# EAGLE board traintimes (EAGLE 6.5.0)
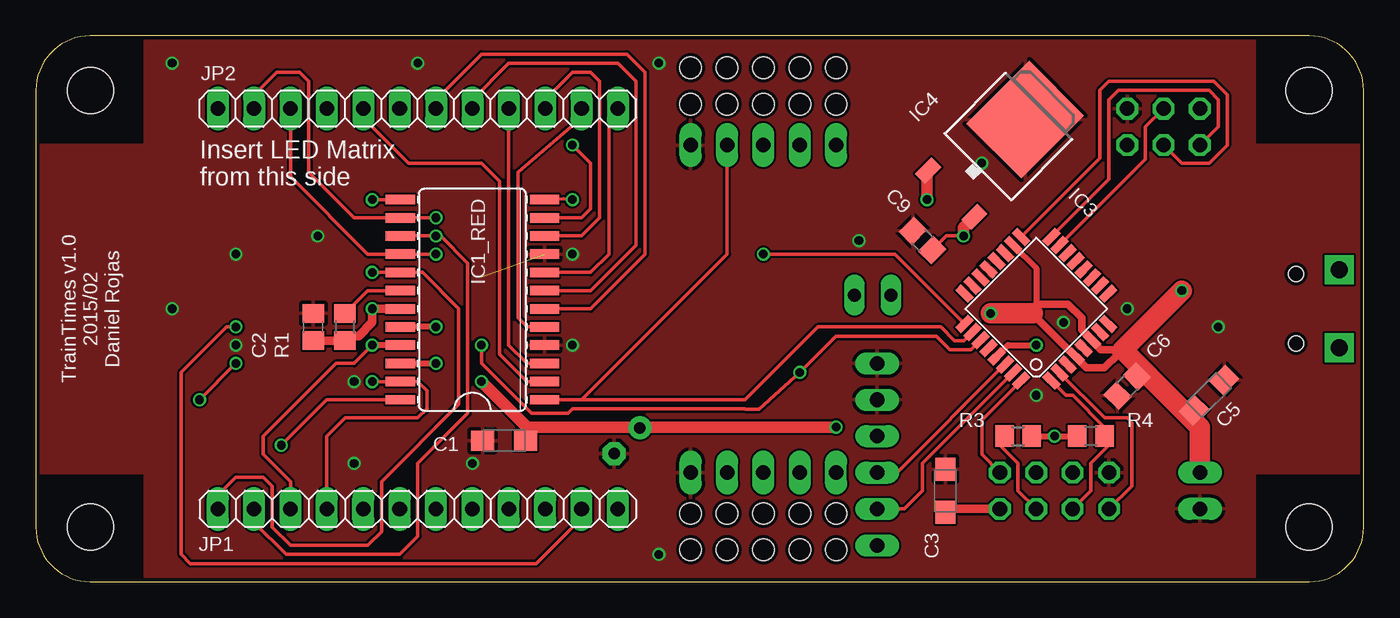
[diagram p0: board, top side]
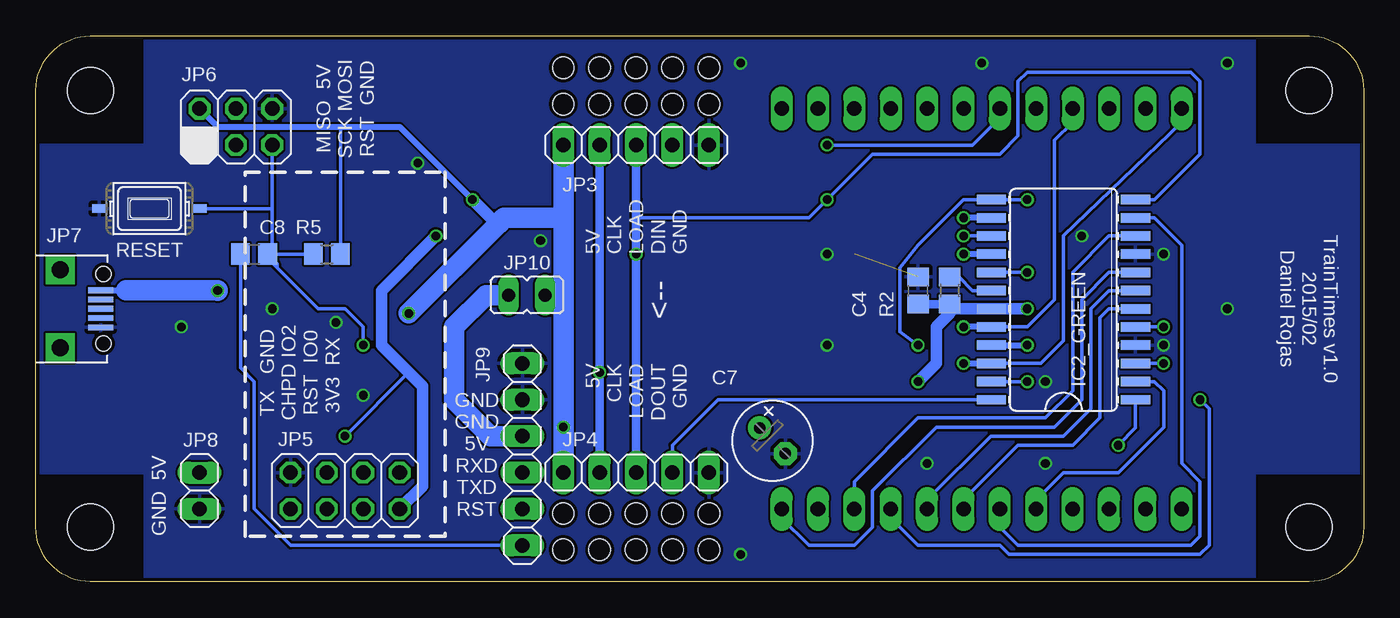
[diagram p1: board, bottom side, seen from below]

Size 92.71 x 38.1 mm. Coordinates in mm from the lower left corner, seen from the top.
Outline: 0,34.29 0,3.81 arc90 3.81,0 88.9,0 arc90 92.71,3.81 92.71,34.29 arc90 88.9,38.1 3.81,38.1 arc90 0,34.29
Copper layers (1*16): Top 0.035mm / dielectric 1.5mm / Bottom 0.035mm
Design rules "ITEADstudio_DRC": minimum track width 6mil, minimum drill 12mil, track to track 6mil, track to pad 6mil, pad to pad 6mil, via to via 6mil, smd to smd 0mil, copper to edge 10mil, drill to drill 10mil, minimum pad ring 10mil, minimum via ring 6mil, stop-mask expansion 2mil, vias tented up to drill 100mil, thermal gap 10mil
Holes 1.5 mm at 45.72,35.88 48.26,35.88 50.8,35.88 53.34,35.88 55.88,35.88 45.72,2.22 48.26,2.22 50.8,2.22 53.34,2.22 55.88,2.22 45.72,33.34 48.26,33.34 50.8,33.34 53.34,33.34 55.88,33.34 45.72,4.76 48.26,4.76 50.8,4.76 53.34,4.76 55.88,4.76
Holes 3.2 mm at 3.81,34.29 3.81,3.81 88.9,3.81 88.9,34.29

## Footprints (pad centres in the part's own frame; a part is rotated, then mirrored left to right if it is on the bottom)
SMC_A = smd 1.6 x 1.4: + -1.5,0; - 1.5,0
C0805 = smd 1.3 x 1.5: 1 -0.95,0; 2 0.95,0
E2,5-6 = drill 0.813 pad 1.6: + -1.27,0 | drill 0.813 pad 1.6 octagon: - 1.27,0
SO24L = smd 0.66 x 2.032: 1 -6.985,-5.029; 2 -5.715,-5.029; 3 -4.445,-5.029; 4 -3.175,-5.029; 5 -1.905,-5.029; 6 -0.635,-5.029; 7 0.635,-5.029; 8 1.905,-5.029; 9 3.175,-5.029; 10 4.445,-5.029; 11 5.715,-5.029; 12 6.985,-5.029; 13 6.985,5.029; 14 5.715,5.029; 15 4.445,5.029; 16 3.175,5.029; 17 1.905,5.029; 18 0.635,5.029; 19 -0.635,5.029; 20 -1.905,5.029; 21 -3.175,5.029; 22 -4.445,5.029; 23 -5.715,5.029; 24 -6.985,5.029
TQFP32-08 = smd 1.27 x 0.559: 1 -4.293,2.8; 2 -4.293,2; 3 -4.293,1.2; 4 -4.293,0.4; 5 -4.293,-0.4; 6 -4.293,-1.2; 7 -4.293,-2; 8 -4.293,-2.8; 17 4.293,-2.8; 18 4.293,-2; 19 4.293,-1.2; 20 4.293,-0.4; 21 4.293,0.4; 22 4.293,1.2; 23 4.293,2; 24 4.293,2.8 | smd 0.559 x 1.27: 9 -2.8,-4.293; 10 -2,-4.293; 11 -1.2,-4.293; 12 -0.4,-4.293; 13 0.4,-4.293; 14 1.2,-4.293; 15 2,-4.293; 16 2.8,-4.293; 25 2.8,4.293; 26 2,4.293; 27 1.2,4.293; 28 0.4,4.293; 29 -0.4,4.293; 30 -1.2,4.293; 31 -2,4.293; 32 -2.8,4.293
TO252 = smd 1 x 1.6: 1 -2.28,-4.8; 2 2.28,-4.8 | smd 5.4 x 6.2: 3 0,2.5
1X12 = drill 1.016 long: 1 -13.97,0; 2 -11.43,0; 3 -8.89,0; 4 -6.35,0; 5 -3.81,0; 6 -1.27,0; 7 1.27,0; 8 3.81,0; 9 6.35,0; 10 8.89,0; 11 11.43,0; 12 13.97,0
1X05 = drill 1.016 long: 1 -5.08,0; 2 -2.54,0; 3 0,0; 4 2.54,0; 5 5.08,0
2X04 = drill 1.016 octagon: 1 -3.81,-1.27; 2 -3.81,1.27; 3 -1.27,-1.27; 4 -1.27,1.27; 5 1.27,-1.27; 6 1.27,1.27; 7 3.81,-1.27; 8 3.81,1.27
2X03 = drill 1.016 octagon: 1 -2.54,-1.27; 2 -2.54,1.27; 3 0,-1.27; 4 0,1.27; 5 2.54,-1.27; 6 2.54,1.27
FCI-10103594-0001LF = smd 0.4 x 1.75: 1 -1.3,4.525; 2 -0.65,4.525; 3 0,4.525; 4 0.65,4.525; 5 1.3,4.525 | drill 1.2 pad 2 square: P$3 -2.725,1.7; P$4 2.725,1.7 | hole 1.05: -2.425,4.73; 2.425,4.73
1X02 = drill 1.016 long: 1 -1.27,0; 2 1.27,0
1X06 = drill 1.016 long: 1 -6.35,0; 2 -3.81,0; 3 -1.27,0; 4 1.27,0; 5 3.81,0; 6 6.35,0
JP1 = drill 0.914 long: 1 0,-1.27; 2 0,1.27
R0805 = smd 1.3 x 1.5: 1 -0.95,0; 2 0.95,0
SW_TACT_3X6 = smd 1 x 0.6: 1 -3.5,0; 2 3.5,0

## Placement (x,y rotation side)
C1  1uF  [SMC_A]  32.7,9.84 180 top
C2  100nF  [C0805]  19.37,17.78 90 top
C3  1uF  [SMC_A]  63.5,6.35 90 top
C4  100nF  [C0805]  31.11,20.32 90 bottom
C5  1uF  [SMC_A]  81.92,13.02 45 top
C6  100nF  [C0805]  76.2,13.65 225 top
C7  22uF  [E2,5-6]  41.27,9.84 315 bottom
C8  100nF  [C0805]  77.47,22.86 0 bottom
C9  100nF  [C0805]  61.91,23.81 135 top
IC1_RED  MAX7221CWG  [SO24L]  30.48,19.68 90 top
IC2_GREEN  MAX7221CWG  [SO24L]  20.95,19.68 90 bottom
IC3  ATMEGA328P  [TQFP32-08]  69.85,19.05 135 top
IC4  TS2940CP33  [TO252]  67.31,30.48 315 top
JP1  LED_PIN_1-12  [1X12]  26.67,5.08 0 top
JP2  LED_PIN_24-13  [1X12]  26.67,33.02 180 top
JP3  BUS_IN  [1X05]  50.8,30.48 0 bottom
JP4  BUS_OUT  [1X05]  50.8,7.62 0 bottom
JP5  ESP-01  [2X04]  71.12,6.35 180 bottom
JP6  ICSP  [2X03]  78.74,31.75 0 bottom
JP7  USB  [FCI-10103594-0001LF]  92.71,19.05 270 bottom
JP8  POWER  [1X02]  81.28,6.35 270 bottom
JP9  FTDI  [1X06]  58.74,8.89 90 bottom
JP10  FTDI_5V_EN  [JP1]  58.42,20 270 bottom
R1  3k3  [R0805]  21.59,17.78 90 top
R2  3k3  [R0805]  28.89,20.32 90 bottom
R3  10k  [R0805]  68.58,10.16 0 top
R4  10k  [R0805]  73.66,10.16 180 top
R5  10k  [R0805]  72.39,22.86 0 bottom
SW1  RESET  [SW_TACT_3X6]  84.77,26.04 180 bottom

## Library data of the parts
C1-C9 R1-R5 = rcl
IC1_RED IC2_GREEN = max7219
IC3 = atmel; MPN: ATMEGA8-16AU; OC_FARNELL: 9171371; OC_NEWARK: 73M8863
IC4 = linear
JP1-JP6 JP8 JP9 = pinhead
JP7 = daspilker
JP10 = jumper
SW1 = dp_devices

## Nets
+3V3: C3.+ C9.1 IC4.2 JP5.2 R3.2 R4.2
+5V: C1.+ C2.1 C4.1 C5.+ C6.1 C7.+ IC1_RED.19 IC2_GREEN.19 IC3.4 IC3.6 IC3.18 IC4.1 JP3.1 JP4.1 JP6.2 JP7.1 JP8.1 JP10.2 R1.1 R2.1 R5.2
CLK: IC1_RED.13 IC2_GREEN.13 IC3.27 JP3.2 JP4.2
DIN_EXT: IC1_RED.1 IC3.26 JP3.4
DINDOUT_INT: IC1_RED.24 IC2_GREEN.1
DOUT_EXT: IC2_GREEN.24 JP4.4
ESP_CHPD: IC3.1 JP5.6 R4.1
ESP_IO0: JP5.3
ESP_IO2: JP5.5
ESP_RST: JP5.4 R3.1
ESP_RX: IC3.32 JP5.1
ESP_TX: IC3.2 JP5.8
GND: C1.- C2.2 C3.- C4.2 C5.- C6.2 C7.- C9.2 IC1_RED.4 IC1_RED.9 IC2_GREEN.4 IC2_GREEN.9 IC3.3 IC3.5 IC3.21 IC4.3 JP3.5 JP4.5 JP5.7 JP6.6 JP7.5 JP8.2 JP9.5 JP9.6 SW1.2
GRN0: IC2_GREEN.2 JP1.5
GRN1: IC2_GREEN.11 JP1.6
GRN2: IC2_GREEN.6 JP1.7
GRN3: IC2_GREEN.7 JP1.8
GRN4: IC2_GREEN.3 JP1.9
GRN5: IC2_GREEN.10 JP1.10
GRN6: IC2_GREEN.5 JP1.11
GRN7: IC2_GREEN.8 JP1.12
ISET1: IC1_RED.18 R1.2
ISET2: IC2_GREEN.18 R2.2
LOAD: IC1_RED.12 IC2_GREEN.12 IC3.25 JP3.3 JP4.3
MEGA_RST: C8.2 IC3.29 JP6.5 R5.1 SW1.1
MISO: IC3.16 JP6.1
MOSI: IC3.15 JP6.4
RED0: IC1_RED.2 JP2.8
RED1: IC1_RED.11 JP2.7
RED2: IC1_RED.6 JP2.6
RED3: IC1_RED.7 JP2.5
RED4: IC1_RED.3 JP2.4
RED5: IC1_RED.10 JP2.3
RED6: IC1_RED.5 JP2.2
RED7: IC1_RED.8 JP2.1
ROW0_DP: IC1_RED.22 IC2_GREEN.22 JP2.12
ROW1_A: IC1_RED.14 IC2_GREEN.14 JP2.11
ROW2_B: IC1_RED.16 IC2_GREEN.16 JP2.10
ROW3_C: IC1_RED.20 IC2_GREEN.20 JP2.9
ROW4_D: IC1_RED.23 IC2_GREEN.23 JP1.4
ROW5_E: IC1_RED.21 IC2_GREEN.21 JP1.3
ROW6_F: IC1_RED.15 IC2_GREEN.15 JP1.2
ROW7_G: IC1_RED.17 IC2_GREEN.17 JP1.1
SCK: IC3.17 JP6.3
UART_DTR: C8.1 JP9.1
UART_RX: IC3.30 JP9.3
UART_TX: IC3.31 JP9.2
UART_VCC: JP9.4 JP10.1

## Tracks (layer width: path | path; a pad name or v marks a point on that pad's centre or on a via)
+3V3  (via drill 0.6)
  Top 0.254: v64.77,24.13 63.57,24.13 C9.1
  Top 0.406: R3.2 v71.12,10.16 | v71.12,10.16 | v71.12,10.16 R4.2
  Top 0.61: C3.+ 63.76,5.08 JP5.2 | R3.2
  Top 0.813: v64.77,24.13 64.77,24.72 IC4.2
  Bottom 0.254: v71.12,10.16 66.67,14.61
  Bottom 0.813: v64.77,24.13 68.58,20.32 68.58,16.51 66.67,14.61 65.72,13.65 65.72,6.67 JP5.2
+5V  (via drill 0.6)
  Top 0.406: IC4.1 62.23,28.62 | IC3.18 69.85,21.88 69.85,19.37 69.85,18.73 | 75.56,15.88 75.56,16.19 75.88,16.19 | 69.85,18.41 69.92,18.41 | C6.1 76.87,14.64 77.15,14.92
  Top 0.508: 75.56,15.88 75.88,16.19 | 69.85,18.73 69.85,18.41 72.6,15.66 | 72.6,15.66 73.34,14.92 74.61,14.92 75.56,15.88 | 73.34,17.25 IC3.6 73.03,17.57 73.03,18.41 72.07,19.37 69.85,19.37 | 75.56,15.88 75.25,16.19 74.37,16.19 73.31,17.25 | IC3.4 72.6,15.66
  Top 0.61: 69.85,18.73 69.6,18.73 | C1.+ 34.2,10.79 34.29,10.79 | C7.+ 40.01,10.79 | C5.+ 78.42,13.44 78.42,13.65 | C2.1 R1.1 21.91,17.14 22.54,17.14 23.5,18.1 v23.5,19.05 IC1_RED.19
  Top 0.813: v55.88,10.79 40.01,10.79 34.29,10.79 v31.11,13.97 | 62.23,28.62 v62.23,26.67
  Top 1.422: v66.67,18.73 69.6,18.73 | JP8.1 81.28,10.79 78.42,13.65 77.15,14.92 75.88,16.19 v80.01,20.32
  Bottom 0.254: 28.89,18.73 | R5.2 71.44,31.75
  Bottom 0.406: JP6.2 80.01,31.75 71.44,31.75 67.31,31.75 v62.23,26.67
  Bottom 0.432: JP7.1 86.41,20.35
  Bottom 0.483: 80.04,20.35 v80.01,20.32
  Bottom 0.61: 28.89,18.73 28.57,19.05 | R2.1 C4.1 | JP10.2 56.2,20 arc-90 55.88,20.32
  Bottom 0.813: v23.5,19.05 IC2_GREEN.19 28.57,19.05 R2.1 | v31.11,13.97 29.84,15.24 29.84,17.78 28.89,18.73 | v62.23,26.67 60.48,24.92
  Bottom 1.422: JP4.1 v55.88,10.79 55.88,20.32 55.88,25.4 | JP3.1 55.88,25.4 | v66.67,18.73 60.48,24.92 60.01,25.4 55.88,25.4 | 86.41,20.35 80.01,20.35 v80.01,20.32
CLK  (via drill 0.6)
  Top 0.254: v23.5,26.67 IC1_RED.13 | v31.11,16.51 31.11,15.24 34.61,11.75 37.15,11.75 37.47,12.06 49.53,12.06 49.55,12.05 50.5,12.05 v53.34,14.61 55.88,17.14 62.87,17.14 63.82,16.19 65.3,16.19 IC3.27
  Bottom 0.254: v23.5,26.67 IC2_GREEN.13 27.94,26.67 31.11,23.5 32.38,21.91 32.38,17.46 v31.11,16.51
  Bottom 0.61: JP4.2 v53.34,14.61 JP3.2
DIN_EXT
  Top 0.254: JP3.4 48.26,22.86 38.1,12.7 IC1_RED.1 49.53,12.7 52.07,15.24 52.39,15.56 54.61,17.78 63.18,17.78 64.14,16.83 64.8,16.83 IC3.26
DINDOUT_INT  (via drill 0.6)
  Top 0.254: IC1_RED.24 20.32,12.7 v17.14,9.53
  Bottom 0.254: v17.14,9.53 15.93,10.74 IC2_GREEN.1
DOUT_EXT
  Bottom 0.254: IC2_GREEN.24 45.09,12.7 48.26,9.53 JP4.4
ESP_CHPD
  Top 0.254: JP5.6 73.66,6.35 73.66,8.26 74.93,9.53 74.93,9.84 R4.1 74.61,10.8 72.39,13.02 71.92,13.02 IC3.1
ESP_RST
  Top 0.254: JP5.4 68.58,6.35 68.58,8.26 67.31,9.53 67.31,9.84 R3.1
ESP_RX
  Top 0.254: IC3.32 66.04,11.28 66.04,8.89 JP5.1
ESP_TX
  Top 0.254: JP5.8 76.52,6.67 76.52,11.11 76.2,11.43 74.64,11.43 IC3.2
GND  (via drill 0.6)  (1 unrouted)
  other vias: 37.47,22.86 13.97,22.86 13.97,16.51 37.47,16.51 19.68,24.13 22.23,13.97 9.53,36.2 43.5,36.2 9.53,19.05 26.67,36.2 43.5,1.91 22.23,8.26 30.48,8.26 66.04,29.21 82.55,17.78 69.85,13.02 57.47,23.81 76.2,19.05 71.75,18.1
  pour Bottom: 0,7.62 7.62,7.62 7.62,0 85.09,0 85.09,7.62 92.71,7.62 92.71,30.48 85.09,30.48 85.09,38.1 7.62,38.1 7.62,30.48 0,30.48
  pour Top: 0,7.62 7.62,7.62 7.62,0 85.09,0 85.09,7.62 92.71,7.62 92.71,30.48 85.09,30.48 85.09,38.1 7.62,38.1 7.62,30.48 0,30.48
GRN0
  Bottom 0.254: IC2_GREEN.2 14.61,13.97 13.97,13.34 13.97,10.79 17.14,7.62 20.95,7.62 22.86,5.71 JP1.5
GRN1
  Bottom 0.254: JP1.6 25.4,3.81 24.13,2.54 12.06,2.54 11.43,3.17 11.43,6.99 12.7,8.26 12.7,23.5 14.61,25.4 IC2_GREEN.11
  Bottom 0.406: 16.51,25.4 IC2_GREEN.11
GRN2
  Bottom 0.254: JP1.7 27.94,5.71 24.13,9.53 20.32,9.53 18.41,11.43 18.41,18.41 17.78,19.05 IC2_GREEN.6 15.24,19.05
GRN3
  Bottom 0.254: JP1.8 30.48,5.71 26.04,10.16 20.95,10.16 19.05,12.06 19.05,19.05 17.78,20.32 IC2_GREEN.7
GRN4  (via drill 0.6)
  Top 0.254: v11.43,12.7 v13.97,15.24
  Bottom 0.254: JP1.9 33.02,4.45 31.11,2.54 25.4,2.54 24.77,1.91 11.43,1.91 10.79,2.54 10.79,12.06 v11.43,12.7 | IC2_GREEN.3 v13.97,15.24
GRN5
  Bottom 0.254: JP1.10 35.56,6.99 31.11,11.43 22.23,11.43 20.32,13.34 20.32,21.59 17.78,24.13 IC2_GREEN.10
GRN6  (via drill 0.6)
  Top 0.254: v13.97,17.78 13.34,17.78 10.16,14.61 10.16,1.91 10.79,1.27 34.92,1.27 38.1,4.45 JP1.11
  Bottom 0.254: JP1.11 38.1,4.45 | IC2_GREEN.5 v13.97,17.78
GRN7
  Bottom 0.254: JP1.12 40.64,4.45 38.73,2.54 35.56,2.54 34.29,3.81 34.29,6.35 29.84,10.79 21.59,10.79 19.68,12.7 19.68,19.68 17.78,21.59 IC2_GREEN.8
ISET1
  Top 0.254: R1.2 23.18,20.32 IC1_RED.18
ISET2
  Bottom 0.254: IC2_GREEN.18 27.3,20.32 28.25,21.27 R2.2
LOAD  (via drill 0.6)
  Top 0.254: IC1_RED.12 36.83,26.72 v37.47,26.67 | IC3.25 59.97,22.86 v50.8,22.86
  Bottom 0.254: IC2_GREEN.12 14.61,26.67 11.43,29.84 11.43,34.92 12.06,35.56 23.5,35.56 24.13,34.92 24.13,31.11 25.4,29.84 34.29,29.84 v37.47,26.67 38.73,25.4 50.8,25.4 50.8,26.67
  Bottom 0.61: JP4.3 v50.8,22.86 50.8,26.67 JP3.3
MEGA_RST  (via drill 0.6)
  Top 0.406: IC3.29 67.88,16.51 v69.85,16.51
  Bottom 0.254: JP6.5 76.2,26.04 | 76.2,26.04 76.2,22.26 75.86,21.93 | 75.86,21.93 75.86,22.2 C8.2 R5.1 | v69.85,16.51 69.85,17.78 71.12,19.05 72.99,19.05 75.86,21.93 | SW1.1 76.2,26.04
MISO
  Top 0.254: JP6.1 82.55,31.75 82.55,33.66 81.92,34.29 75.56,34.29 74.93,33.66 74.93,28.09 IC3.16
MOSI
  Top 0.254: IC3.15 77.47,29.5 77.47,31.75 JP6.4
RED0
  Top 0.254: JP2.8 22.86,32.38 26.04,29.21 31.11,29.21 32.38,27.94 32.38,15.88 34.29,13.97 IC1_RED.2
RED1  (via drill 0.6)
  Top 0.254: v37.47,30.48 38.73,29.21 38.73,26.04 38.1,25.4 IC1_RED.11
  Bottom 0.254: v37.47,30.48 27.3,30.48 25.4,32.38 JP2.7
RED2
  Top 0.254: JP2.6 27.94,33.66 31.11,36.83 41.27,36.83 42.55,35.56 42.55,22.86 38.73,19.05 IC1_RED.6
RED3
  Top 0.254: JP2.5 30.48,33.66 33.02,36.2 40.64,36.2 41.91,34.92 41.91,23.5 38.73,20.32 IC1_RED.7
RED4
  Top 0.254: JP2.4 33.02,16.51 34.29,15.24 IC1_RED.3
RED5
  Top 0.254: JP2.3 35.56,33.66 37.47,35.56 38.73,35.56 39.37,34.92 39.37,25.4 38.1,24.13 IC1_RED.10
RED6
  Top 0.254: JP2.2 38.1,32.38 33.66,28.57 33.66,18.41 34.29,17.78 IC1_RED.5
RED7
  Top 0.254: JP2.1 40.64,32.38 40.01,31.75 40.01,22.86 38.73,21.59 IC1_RED.8
ROW0_DP  (via drill 0.6)
  Top 0.406: IC1_RED.22 v27.94,15.24
  Bottom 0.254: JP2.12 12.7,32.07 20.95,24.13 20.95,16.83 22.54,15.24 27.3,15.24
  Bottom 0.406: v27.94,15.24 27.3,15.24 IC2_GREEN.22
ROW1_A  (via drill 0.6)
  Top 0.254: v27.94,25.4 IC2_GREEN.14 IC1_RED.14 22.23,25.4 19.05,28.57 19.05,34.92 18.41,35.56 16.83,35.56 15.24,33.97 JP2.11
  Bottom 0.406: IC2_GREEN.14 v27.94,25.4
ROW2_B  (via drill 0.6)
  Top 0.254: v27.94,22.86 26.67,22.86 IC1_RED.16 23.18,22.86 17.78,28.26 JP2.10
  Bottom 0.406: IC2_GREEN.16 v27.94,22.86
ROW3_C  (via drill 0.6)
  Top 0.406: v27.94,17.78 IC1_RED.20
  Bottom 0.254: JP2.9 20.32,32.07 21.59,30.8 21.59,19.68 23.5,17.78 26.67,17.78
  Bottom 0.406: IC2_GREEN.20 26.67,17.78 v27.94,17.78
ROW4_D  (via drill 0.6)
  Top 0.254: JP1.4 20.32,10.16 21.59,11.43 26.67,11.43 27.3,12.06 27.3,13.34 26.67,13.97 IC1_RED.23 v23.5,13.97
  Bottom 0.254: IC2_GREEN.23 v23.5,13.97
ROW5_E  (via drill 0.6)
  Top 0.254: v23.5,16.51 22.23,15.24 20.95,15.24 15.88,10.16 15.88,8.89 17.78,6.99 JP1.3
  Top 0.406: IC1_RED.21 v23.5,16.51
  Bottom 0.406: IC2_GREEN.21 v23.5,16.51
ROW6_F  (via drill 0.6)
  Top 0.254: JP1.2 15.24,4.13 17.46,1.91 25.4,1.91 26.67,3.17 26.67,8.26 30.16,11.75 30.16,22.23 28.26,24.13 v27.94,24.13 IC1_RED.15
  Bottom 0.254: IC2_GREEN.15 v27.94,24.13
ROW7_G  (via drill 0.6)
  Top 0.254: JP1.1 12.7,6.03 13.97,7.3 15.88,7.3 16.51,6.67 16.51,3.81 17.78,2.54 23.18,2.54 24.13,3.49 24.13,6.99 29.53,12.38 29.53,19.05 26.99,21.59 26.67,21.59 IC1_RED.17 v23.5,21.59
  Bottom 0.254: IC2_GREEN.17 v23.5,21.59
SCK
  Top 0.254: IC3.17 74.3,29.57 74.3,34.29 74.93,34.92 82.23,34.92 83.19,33.97 83.19,30.48 81.92,29.21 80.01,29.21 JP6.3
UART_DTR
  Bottom 0.254: JP9.1 74.93,2.54 77.47,5.08 77.47,13.97 78.42,14.92 C8.1
UART_RX
  Top 0.254: IC3.30 60.12,7.62 JP9.3
UART_TX
  Top 0.254: JP9.2 60.64,5.08 61.91,6.35 61.91,8.26 62.2,8.57 IC3.31
UART_VCC
  Bottom 1.422: JP9.4 60.96,10.16 63.5,12.7 63.5,17.78 61.28,20 JP10.1

## Text on the board
tPlace: Insert LED Matrix / from this side | TrainTimes v1.0 / 2015/02 / Daniel Rojas
bPlace: TrainTimes v1.0 / 2015/02 / Daniel Rojas
bNames: MISO 5V / SCK MOSI / RST GND | 5V / CLK / LOAD / DIN / GND | RESET | <-- | 5V / CLK / LOAD / DOUT / GND | TX GND / CHPD IO2 / RST IO0 / 3V3 RX | GND / GND / 5V / RXD / TXD / RST | 5V | GND